# Altium PCB PDM-C_5vRelay_Board.PcbDoc
Units mil, origin at the board's own origin, x right, y up, seen from the top; angles counter-clockwise.
Board outline 5000 x 4200 mil, 2 copper layers (Top Layer, Bottom Layer); 110 components, 65 nets, 342 pads, 82 vias.
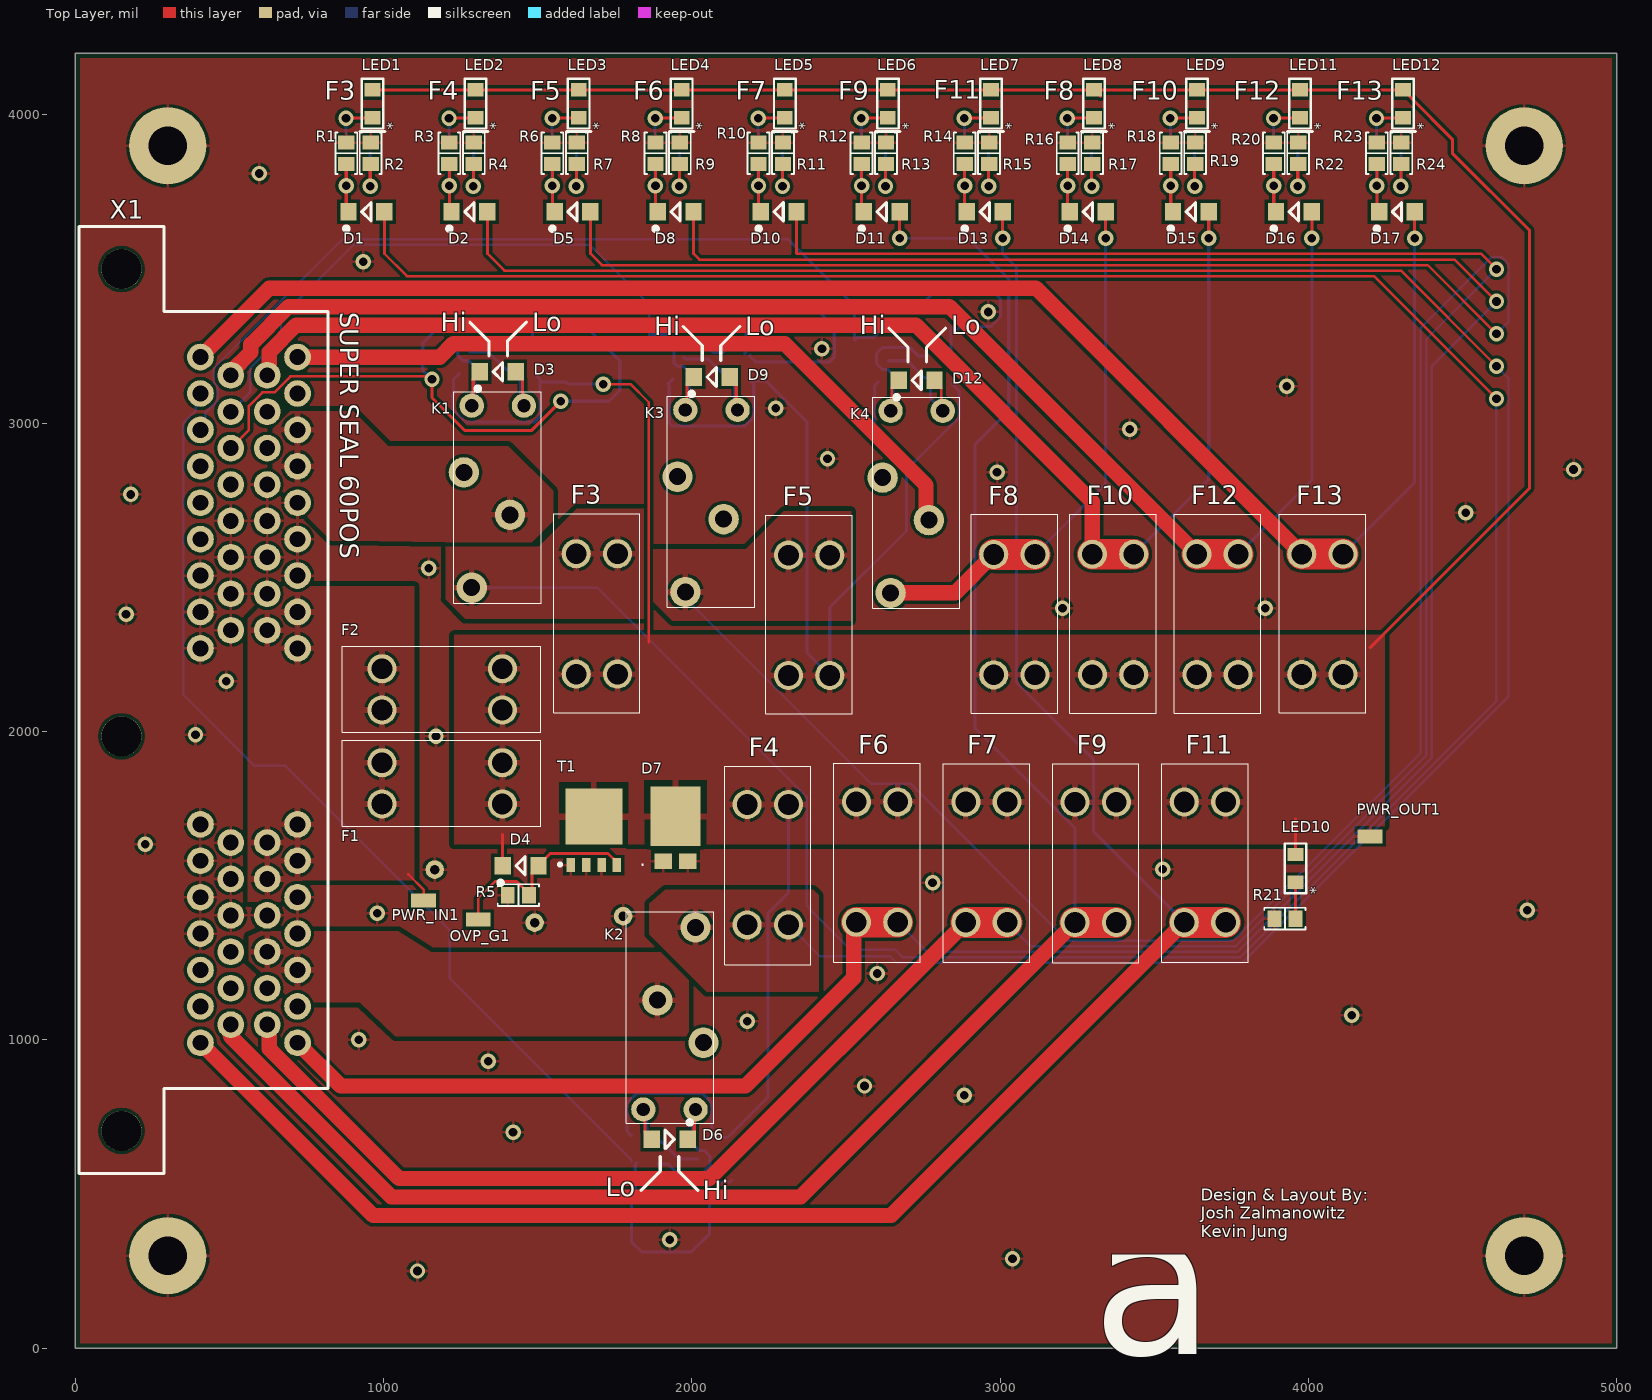
[diagram p0: Top Layer view]
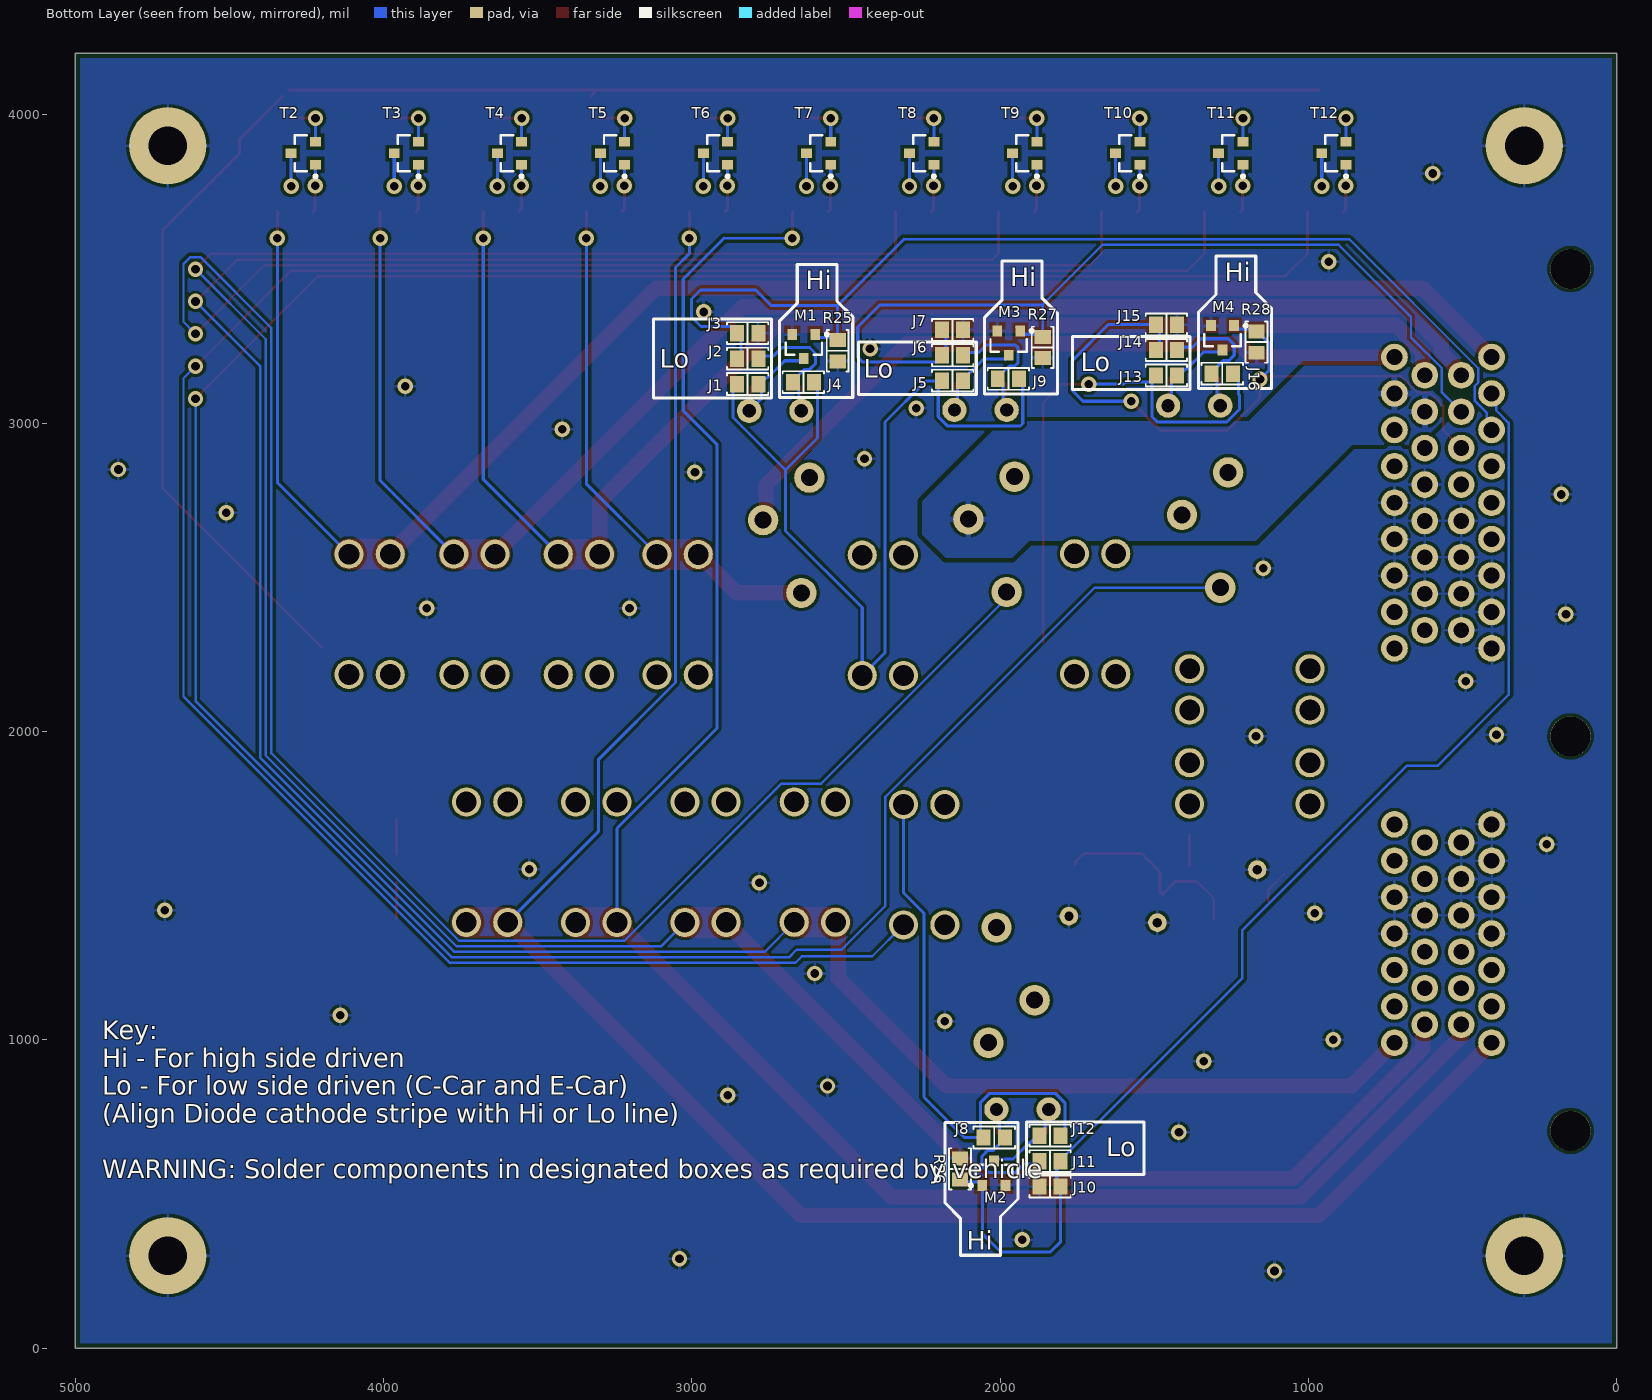
[diagram p1: Bottom Layer view, seen from below]
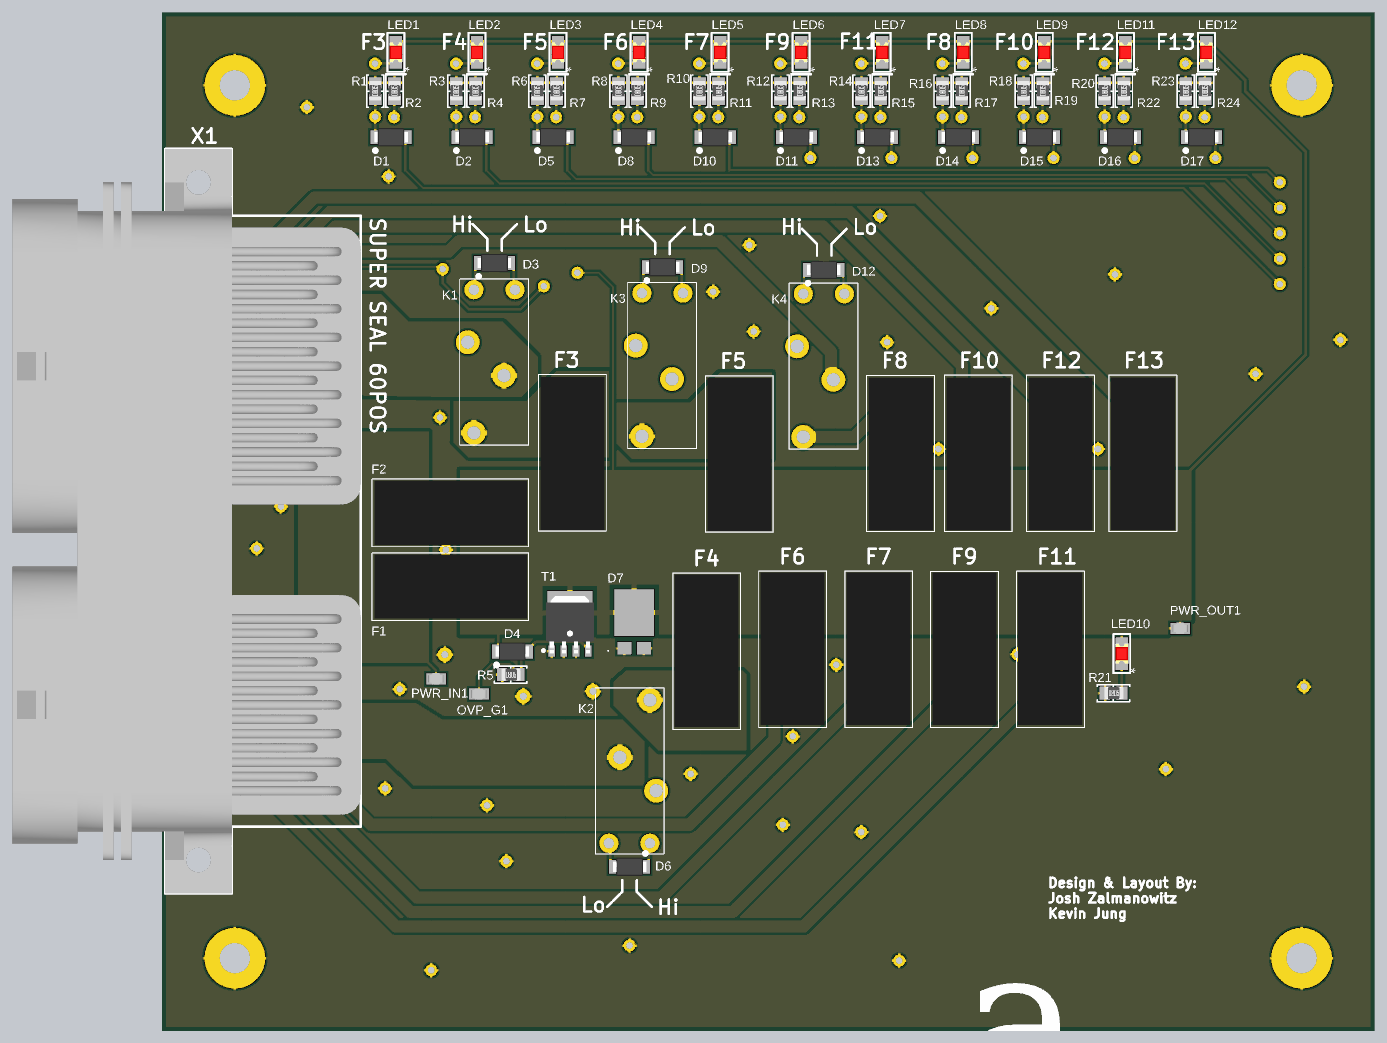
[diagram p2: 3D render of the assembled board from above, using the file's embedded part models]
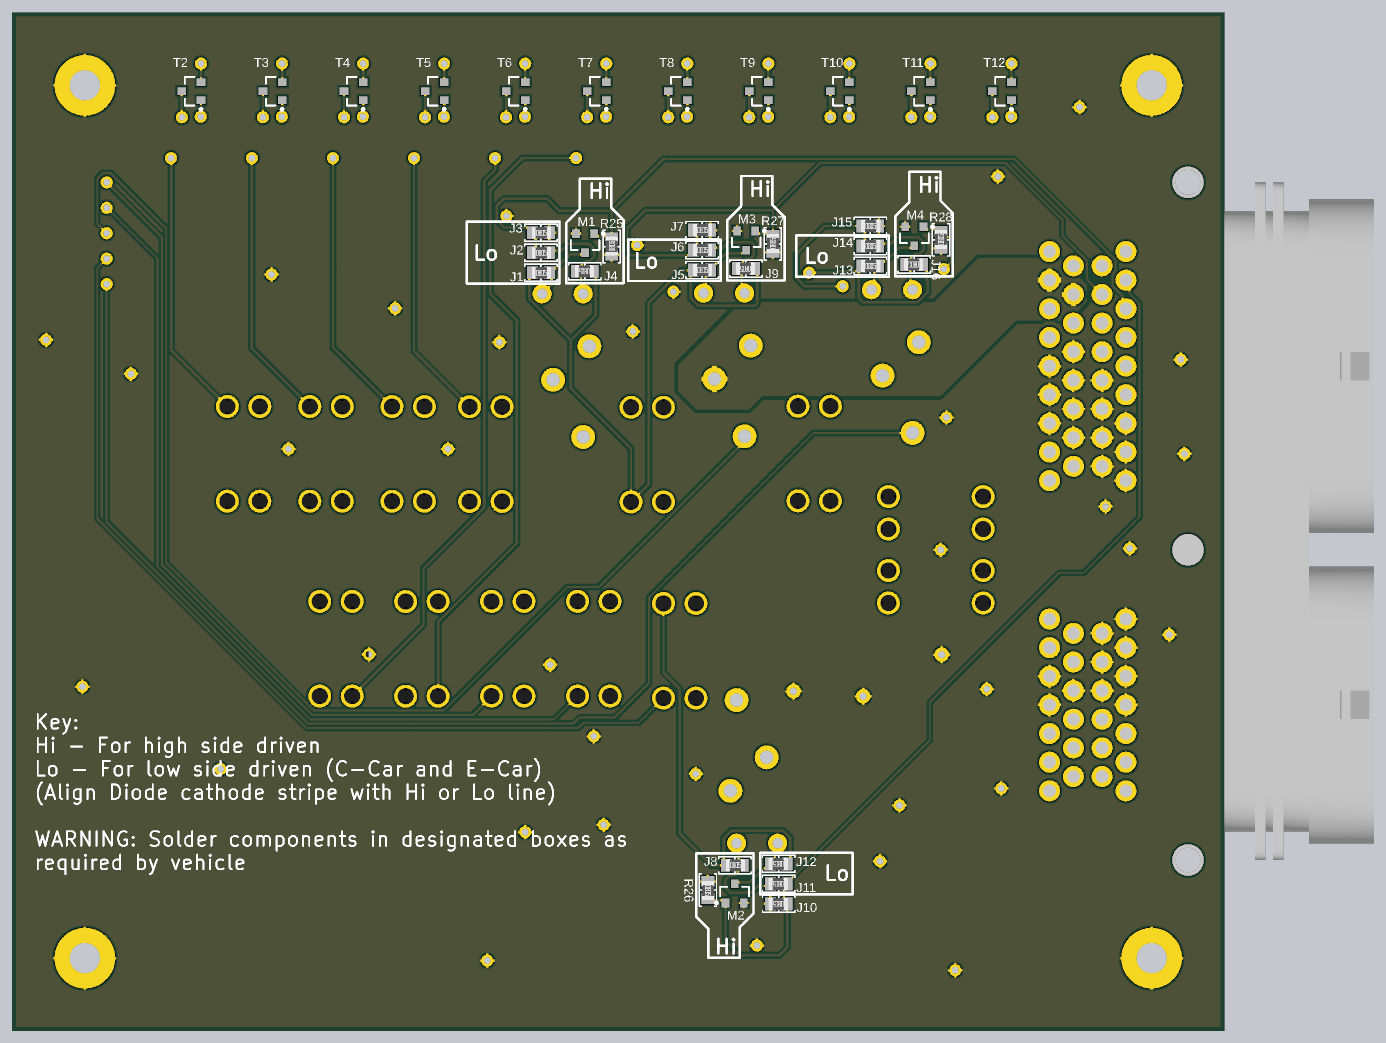
[diagram p3: 3D render of the assembled board from below, using the file's embedded part models]

## Layer stack, top to bottom
Top Solder: solder mask 0.4, Solder Resist, Dk 3.5
Top Layer: signal copper 1.4
Dielectric 1: dielectric 12.6, FR-4, Dk 4.8
Bottom Layer: signal copper 1.4
Bottom Solder: solder mask 0.4, Solder Resist, Dk 3.5

## Board outline
0,0 5000,0 5000,4200 0,4200

## Design rules (kind name [scope] priority, off if disabled: settings)
BoardOutlineClearance [All] p1: gap=15 ignorepadtopadclearanceinfootprint=FALSE
Clearance [All] p1: gap=10 ignorepadtopadclearanceinfootprint=FALSE except(0: Arc-Hole Track-Hole SMDPad-Hole THPad-Hole Via-Hole Fill-Hole Poly-Hole Region-Hole Text-Hole; 8: Track-THPad; 15: Poly-Poly)
Height [All] p1: minheight=0 maxheight=10000 prefheight=500
HoleSize [All] p1: absolutevalues=TRUE maxlimit=150 minlimit=10 maxpercent=80.000 minpercent=20.000
MinimumAnnularRing [All] p1: minimumring=10
PolygonConnect [All] p1: connectstyle=Relief reliefconductorwidth=10 reliefentries=4 polygonreliefangle="90 Angle" airgapwidth=10
RoutingVias [All] p1: holewidth=28 width=50 viastyle="Through Hole" minholewidth=28 minwidth=50 maxholewidth=28 maxwidth=50
SolderMaskExpansion [All] p1: expansion=4
Width [All] p1: maxlimit=100 minlimit=8 preferedwidth=10 minimp=50.000000 maximp=50.000000 favimp=50.000000
28 further rules are at their usual default settings.

## Classes and differential pairs
channel class Relay: U_Relay1 U_Relay2 U_Relay3 U_Relay4
channel class Blown_Fuse_LED: U_Blown_Fuse_LED1 U_Blown_Fuse_LED2 U_Blown_Fuse_LED3 U_Blown_Fuse_LED4 U_Blown_Fuse_LED5 U_Blown_Fuse_LED6 U_Blown_Fuse_LED7 U_Blown_Fuse_LED8 U_Blown_Fuse_LED9 U_Blown_Fuse_LED10 U_Blown_Fuse_LED11
component class U_Superseal: X1
component class U_RVP_OVP_HC: D4 D7 LED10 OVP_G1 PWR_IN1 PWR_OUT1 R5 R21 T1
component class U_Relay4: D12 J1 J2 J3 J4 K4 M1 R25
component class U_Relay3: D9 J5 J6 J7 J9 K3 M3 R27
component class U_Relay2: D3 J13 J14 J15 J16 K1 M4 R21
component class U_Relay1: D6 J8 J10 J11 J12 K2 M2 R26
component class U_Blown_Fuse_LED11: D14 F8 LED8 R16 R17 T5
component class U_Blown_Fuse_LED10: D15 F10 LED9 R18 R19 T4
component class U_Blown_Fuse_LED9: D16 F12 LED11 R20 R22 T3
component class U_Blown_Fuse_LED8: D17 F13 LED12 R23 R24 T2
component class U_Blown_Fuse_LED7: D7 F6 LED4 R8 R9 T9
component class U_Blown_Fuse_LED6: D10 F7 LED5 R10 R11 T8
component class U_Blown_Fuse_LED5: D11 F9 LED6 R12 R13 T7
component class U_Blown_Fuse_LED4: D13 F11 LED7 R14 R15 T6
component class U_Blown_Fuse_LED3: D5 F5 LED3 R6 R7 T10
component class U_Blown_Fuse_LED2: D1 F3 LED1 R1 R2 T12
component class U_Blown_Fuse_LED1: D2 F4 LED2 R3 R4 T11
component class PDM: F1 F2

## Components (designator, comment, footprint, x,y, rotation, side; value= is the part's Value field where it differs from the comment)
D1 "1N5819" SOD123F 944.29,3686 r180 top value=1A (schematic designator D3)
D2 "1N5819" SOD123F 1278.58,3686 r180 top value=1A (schematic designator D3)
D3 "DIODE" SOD123F 1370.55,3167 r180 top value=1A (schematic designator D1)
D4 "DDZ9701-7" SOD123F 1444.29,1564.36 r180 top value=14Vz (schematic designator D7)
D5 "1N5819" SOD123F 1612.87,3686 r180 top value=1A (schematic designator D3)
D6 "DIODE" SOD123F 1928.18,677 r0 top value=1A (schematic designator D1)
D7 "DIODE_2A1K" TO-277 1946.92,1689.06 r90 top value="20 A" (schematic designator D8)
D8 "1N5819" SOD123F 1947.16,3686 r180 top value=1A (schematic designator D3)
D9 "DIODE" SOD123F 2064.26,3150 r180 top value=1A (schematic designator D1)
D10 "1N5819" SOD123F 2281.45,3686 r180 top value=1A (schematic designator D3)
D11 "1N5819" SOD123F 2615.74,3686 r180 top value=1A (schematic designator D3)
D12 "DIODE" SOD123F 2729,3139 r180 top value=1A (schematic designator D1)
D13 "1N5819" SOD123F 2950.03,3686 r180 top value=1A (schematic designator D3)
D14 "1N5819" SOD123F 3284.32,3686 r180 top value=1A (schematic designator D3)
D15 "1N5819" SOD123F 3618.62,3686 r180 top value=1A (schematic designator D3)
D16 "1N5819" SOD123F 3952.91,3686 r180 top value=1A (schematic designator D3)
D17 "1N5819" SOD123F 4287.2,3686 r180 top value=1A (schematic designator D3)
F1 "Fuse" 3568-MiniFuseHolder 1190.28,1831.93 r0 top
F2 "Fuse" 3568-MiniFuseHolder 1190.28,2136.85 r0 top
F3 "" 3568-MiniFuseHolder 1691.77,2381.48 r270 top locked
F4 "" 3568-MiniFuseHolder 2246.39,1567.98 r90 top locked (schematic designator F3)
F5 "" 3568-MiniFuseHolder 2380.42,2377 r270 top locked (schematic designator F3)
F6 "" 3568-MiniFuseHolder 2600.77,1576.48 r90 top locked (schematic designator F3)
F7 "" 3568-MiniFuseHolder 2955.64,1576.17 r90 top locked (schematic designator F3)
F8 "" 3568-MiniFuseHolder 3046.09,2379 r270 top locked (schematic designator F3)
F9 "" 3568-MiniFuseHolder 3309.96,1575.72 r90 top locked (schematic designator F3)
F10 "" 3568-MiniFuseHolder 3366.29,2379.72 r270 top locked (schematic designator F3)
F11 "" 3568-MiniFuseHolder 3664.31,1576.17 r90 top locked (schematic designator F3)
F12 "" 3568-MiniFuseHolder 3705.18,2380 r270 top locked (schematic designator F3)
F13 "" 3568-MiniFuseHolder 4045.31,2380.17 r270 top locked (schematic designator F3)
J1 "Resistor 1.0 0805 1/10W 10%" "RES 0805/2012" 2819,3127 r180 bottom value=1.0
J2 "Resistor 1.0 0805 1/10W 10%" "RES 0805/2012" 2819,3209.5 r180 bottom value=1.0 (schematic designator J4)
J3 "Resistor 1.0 0805 1/10W 10%" "RES 0805/2012" 2819,3292 r180 bottom value=1.0 (schematic designator J2)
J4 "Resistor 1.0 0805 1/10W 10%" "RES 0805/2012" 2638,3133 r0 bottom value=1.0 (schematic designator J3)
J5 "Resistor 1.0 0805 1/10W 10%" "RES 0805/2012" 2154.26,3138 r180 bottom value=1.0 (schematic designator J1)
J6 "Resistor 1.0 0805 1/10W 10%" "RES 0805/2012" 2154.26,3220.5 r180 bottom value=1.0 (schematic designator J4)
J7 "Resistor 1.0 0805 1/10W 10%" "RES 0805/2012" 2154.26,3303 r180 bottom value=1.0 (schematic designator J2)
J8 "Resistor 1.0 0805 1/10W 10%" "RES 0805/2012" 2019.18,683 r180 bottom value=1.0 (schematic designator J3)
J9 "Resistor 1.0 0805 1/10W 10%" "RES 0805/2012" 1973.26,3144 r0 bottom value=1.0 (schematic designator J3)
J10 "Resistor 1.0 0805 1/10W 10%" "RES 0805/2012" 1838.18,524 r0 bottom value=1.0 (schematic designator J2)
J11 "Resistor 1.0 0805 1/10W 10%" "RES 0805/2012" 1838.18,606.5 r0 bottom value=1.0 (schematic designator J4)
J12 "Resistor 1.0 0805 1/10W 10%" "RES 0805/2012" 1838.18,689 r0 bottom value=1.0 (schematic designator J1)
J13 "Resistor 1.0 0805 1/10W 10%" "RES 0805/2012" 1460.55,3155 r180 bottom value=1.0 (schematic designator J1)
J14 "Resistor 1.0 0805 1/10W 10%" "RES 0805/2012" 1460.55,3237.5 r180 bottom value=1.0 (schematic designator J4)
J15 "Resistor 1.0 0805 1/10W 10%" "RES 0805/2012" 1460.55,3320 r180 bottom value=1.0 (schematic designator J2)
J16 "Resistor 1.0 0805 1/10W 10%" "RES 0805/2012" 1279.55,3161 r0 bottom value=1.0 (schematic designator J3)
K1 "ACTP112" ACTP112#1 1436,2466.45 r90 top locked
K2 "ACTP112" ACTP112#2 1861.93,1364.55 r270 top locked (schematic designator K1)
K3 "ACTP112" ACTP112#2 2129,2452.45 r90 top locked (schematic designator K1)
K4 "ACTP112" ACTP112#2 2794.66,2449.51 r90 top locked (schematic designator K1)
LED1 "Red LED 0805" 0805_LED 964.29,4036 r270 top value=Red
LED2 "Red LED 0805" 0805_LED 1298.58,4036 r270 top value=Red (schematic designator LED1)
LED3 "Red LED 0805" 0805_LED 1632.87,4036 r270 top value=Red (schematic designator LED1)
LED4 "Red LED 0805" 0805_LED 1967.16,4036 r270 top value=Red (schematic designator LED1)
LED5 "Red LED 0805" 0805_LED 2301.45,4036 r270 top value=Red (schematic designator LED1)
LED6 "Red LED 0805" 0805_LED 2635.74,4036 r270 top value=Red (schematic designator LED1)
LED7 "Red LED 0805" 0805_LED 2970.03,4036 r270 top value=Red (schematic designator LED1)
LED8 "Red LED 0805" 0805_LED 3304.32,4036 r270 top value=Red (schematic designator LED1)
LED9 "Red LED 0805" 0805_LED 3638.62,4036 r270 top value=Red (schematic designator LED1)
LED10 "LED" 0805_LED 3958.31,1555.8 r270 top value=Green (schematic designator LED2)
LED11 "Red LED 0805" 0805_LED 3972.91,4036 r270 top value=Red (schematic designator LED1)
LED12 "Red LED 0805" 0805_LED 4307.2,4036 r270 top value=Red (schematic designator LED1)
M1 "DMG2302UK-7" SOT23-3 2637,3249 r270 bottom value=N_Channel
M2 "DMG2302UK-7" SOT23-3 2020.18,567 r90 bottom value=N_Channel (schematic designator M1)
M3 "DMG2302UK-7" SOT23-3 1972.26,3260 r270 bottom value=N_Channel (schematic designator M1)
M4 "DMG2302UK-7" SOT23-3 1278.55,3277 r270 bottom value=N_Channel (schematic designator M1)
OVP_G1 "RCU-0C" RCU-0C 1307,1389.63 r90 top (schematic designator OVP_G)
PWR_IN1 "RCU-0C" RCU-0C 1130,1451.78 r90 top (schematic designator PWR_IN)
PWR_OUT1 "RCU-0C" RCU-0C 4200,1660 r90 top (schematic designator PWR_OUT)
R1 "Resistor 47k 0805 1/10W 1%" "RES 0805/2012" 879.02,3875.72 r90 top value=47k
R2 "Resistor 470 0805 1/10W 1%" "RES 0805/2012" 958.31,3875.73 r90 top value=470
R3 "Resistor 47k 0805 1/10W 1%" "RES 0805/2012" 1213.31,3875.72 r90 top value=47k (schematic designator R1)
R4 "Resistor 470 0805 1/10W 1%" "RES 0805/2012" 1292.6,3875.73 r90 top value=470 (schematic designator R2)
R5 "Resistor 47k 0805 1/10W 1%" "RES 0805/2012" 1437.29,1469.36 r0 top value=47k (schematic designator R27)
R6 "Resistor 47k 0805 1/10W 1%" "RES 0805/2012" 1547.6,3875.72 r90 top value=47k (schematic designator R1)
R7 "Resistor 470 0805 1/10W 1%" "RES 0805/2012" 1626.89,3875.73 r90 top value=470 (schematic designator R2)
R8 "Resistor 47k 0805 1/10W 1%" "RES 0805/2012" 1881.89,3875.72 r90 top value=47k (schematic designator R1)
R9 "Resistor 470 0805 1/10W 1%" "RES 0805/2012" 1961.18,3875.73 r90 top value=470 (schematic designator R2)
R10 "Resistor 47k 0805 1/10W 1%" "RES 0805/2012" 2216.18,3875.72 r90 top value=47k (schematic designator R1)
R11 "Resistor 470 0805 1/10W 1%" "RES 0805/2012" 2295.47,3875.73 r90 top value=470 (schematic designator R2)
R12 "Resistor 47k 0805 1/10W 1%" "RES 0805/2012" 2550.47,3875.72 r90 top value=47k (schematic designator R1)
R13 "Resistor 470 0805 1/10W 1%" "RES 0805/2012" 2629.76,3875.73 r90 top value=470 (schematic designator R2)
R14 "Resistor 47k 0805 1/10W 1%" "RES 0805/2012" 2884.76,3875.72 r90 top value=47k (schematic designator R1)
R15 "Resistor 470 0805 1/10W 1%" "RES 0805/2012" 2964.05,3875.73 r90 top value=470 (schematic designator R2)
R16 "Resistor 47k 0805 1/10W 1%" "RES 0805/2012" 3219.05,3875.72 r90 top value=47k (schematic designator R1)
R17 "Resistor 470 0805 1/10W 1%" "RES 0805/2012" 3298.34,3875.73 r90 top value=470 (schematic designator R2)
R18 "Resistor 47k 0805 1/10W 1%" "RES 0805/2012" 3553.34,3875.72 r90 top value=47k (schematic designator R1)
R19 "Resistor 470 0805 1/10W 1%" "RES 0805/2012" 3632.63,3875.73 r90 top value=470 (schematic designator R2)
R20 "Resistor 47k 0805 1/10W 1%" "RES 0805/2012" 3887.63,3875.72 r90 top value=47k (schematic designator R1)
R21 "Resistor 470 0805 1/10W 1%" "RES 0805/2012" 3923.86,1393 r0 top value=470 (schematic designator R28)
R22 "Resistor 470 0805 1/10W 1%" "RES 0805/2012" 3966.92,3875.73 r90 top value=470 (schematic designator R2)
R23 "Resistor 47k 0805 1/10W 1%" "RES 0805/2012" 4221.92,3875.72 r90 top value=47k (schematic designator R1)
R24 "Resistor 470 0805 1/10W 1%" "RES 0805/2012" 4301.21,3875.73 r90 top value=470 (schematic designator R2)
R25 "Resistor 47k 0805 1/10W 10%" "RES 0805/2012" 2527,3235 r90 bottom value=47k (schematic designator R1)
R26 "Resistor 47k 0805 1/10W 10%" "RES 0805/2012" 2130.18,581 r270 bottom value=47k (schematic designator R1)
R27 "Resistor 47k 0805 1/10W 10%" "RES 0805/2012" 1862.26,3246 r90 bottom value=47k (schematic designator R1)
R28 "Resistor 47k 0805 1/10W 10%" "RES 0805/2012" 1168.55,3263 r90 bottom value=47k (schematic designator R1)
T1 "PSMN2R2-25YLC 25V Logic Level MOSFET" LFPAK-SO8 1681.92,1672.99 r90 top value=N_Channel (schematic designator T4)
T2 "MMBT4403WT1G" SOT23-3 4260.31,3875.73 r0 bottom (schematic designator T1)
T3 "MMBT4403WT1G" SOT23-3 3926.02,3875.73 r0 bottom (schematic designator T1)
T4 "MMBT4403WT1G" SOT23-3 3591.73,3875.73 r0 bottom (schematic designator T1)
T5 "MMBT4403WT1G" SOT23-3 3257.44,3875.73 r0 bottom (schematic designator T1)
T6 "MMBT4403WT1G" SOT23-3 2923.15,3875.73 r0 bottom (schematic designator T1)
T7 "MMBT4403WT1G" SOT23-3 2588.86,3875.73 r0 bottom (schematic designator T1)
T8 "MMBT4403WT1G" SOT23-3 2254.56,3875.73 r0 bottom (schematic designator T1)
T9 "MMBT4403WT1G" SOT23-3 1920.27,3875.73 r0 bottom (schematic designator T1)
T10 "MMBT4403WT1G" SOT23-3 1585.98,3875.73 r0 bottom (schematic designator T1)
T11 "MMBT4403WT1G" SOT23-3 1251.69,3875.73 r0 bottom (schematic designator T1)
T12 "MMBT4403WT1G" SOT23-3 917.4,3875.73 r0 bottom (schematic designator T1)
X1 "3-6437285-2" "SUPERSEAL 60POS 90Deg" 150,3500 r270 top value=CONN

## Footprints (in the part's own frame and the unit in brackets; to place one, negate y for a bottom-side part, rotate by r counter-clockwise, add the part's x,y. Pads: shape width x height; smd on the part's side, far side on the other; paste and mask are expansions set on the pad)
0805_LED [mm]
  rect 1.1x1.3 smd: 1(-1.15,0) 2(1.15,0)
  silkscreen extent -2.06,-1.02 2.29,1.02, body extent -1.05,-0.67 1.05,0.68, height 0.9
3568-MiniFuseHolder [mm] "3568 Mini Fuse Holder"
  round 2.4 hole 1.7: 1(-4.96,-1.7) 1(-4.96,1.7) 2(4.96,-1.7) 2(4.96,1.7)
  silkscreen extent -8.25,-3.56 8.13,3.56, body extent -8,-4.19 8,3.38, height 16.17
ACTP112#1 [mm] "ACTP112, 12V Relay"
  round 2 hole 1.1: COIL1(15,3.81) COIL2(15,-0.49)
  round 2.5 hole 1.4: COM(0,3.81) NC(9.5,4.46) NO(6,0.66)
  silkscreen extent -1.27,-1.91 16.13,5.3, body extent -1.27,-1.91 16.13,5.33, height 13.5
ACTP112#2 [mm] "ACTP112, 12V Relay"
  round 2 hole 1.1: COIL1(15,3.81) COIL2(15,-0.49)
  round 2.5 hole 1.4: COM(0,3.81) NO(6,0.66)
  round 2.5 hole 1.4 unplated: NC(9.5,4.46)
  silkscreen extent -1.27,-1.91 16.13,5.3, body extent -1.27,-1.91 16.13,5.33, height 13.5
LFPAK-SO8 [mm] "TO, 5-Pads, Body 5.15x5.86mm (max), IPC Low Density"
  rect 1.15x0.7 smd: 1(-2.7,1.905) 2(-2.7,0.635) 3(-2.7,-0.635) 4(-2.7,-1.905)
  rect 4.6x4.7 smd: mb(1.3,0)
  silkscreen extent -2.77,2.65 -2.53,2.9, body extent -2.95,-2.5 3.05,2.5, height 1.25
RCU-0C [mm]
  rect 1.15x2.05 smd: 1(0,0)
  body extent -0.6,-0.77 0.6,0.82, height 1.16
"RES 0805/2012" [mm] "Chip Resistor, 2-Leads, Body 2.00x1.25mm, IPC Medium Density"
  rect 1.15x1.35 smd: 1(-0.875,0) 2(0.875,0)
  silkscreen extent -1.7,-0.9 1.7,0.9, body extent -0.95,-0.62 1.05,0.63, height 0.6
SOD123F [mm] "SODFL, 2-Leads, Body 1.80x3.50mm, IPC Low Density"
  rect 1.35x1.45 smd: 1(-1.475,0) 2(1.475,0)
  silkscreen extent -0.38,-0.76 1.75,1.5, body extent -1.75,-0.95 1.75,0.95, height 1.15
SOT23-3 [mm] "SOT23, 3-Leads, Body 2.92x2.37mm, Pitch 0.95mm, IPC Medium Density, NUP2105L"
  rect 0.9x0.8 smd: 1(-1,0.95) 2(-1,-0.95) 3(1,0)
  silkscreen extent -1.12,-1.5 0.7,2.02, body extent -0.7,-1.52 0.7,1.52, height 1.11
"SUPERSEAL 60POS 90Deg" [mm]
  round 2.2 hole 1.3: A1(7.25,14.5) A2(10.25,14.5) A3(13.25,14.5) A4(16.25,14.5) A5(19.25,14.5) A6(22.25,14.5) A7(25.25,14.5) A8(28.25,14.5) A9(31.25,14.5) A10(8.75,12) A11(11.75,12) A12(14.75,12) A13(17.75,12) A14(20.75,12) A15(23.75,12) A16(26.75,12) A17(29.75,12) A18(8.75,9) A19(11.75,9) A20(14.75,9) A21(17.75,9) A22(20.75,9) A23(23.75,9) A24(26.75,9) A25(29.75,9) A26(7.25,6.5) A27(10.25,6.5) A28(13.25,6.5) A29(16.25,6.5) A30(19.25,6.5) A31(22.25,6.5) A32(25.25,6.5) A33(28.25,6.5) A34(31.25,6.5) B1(45.75,14.5) B2(48.75,14.5) B3(51.75,14.5) B4(54.75,14.5) B5(57.75,14.5) B6(60.75,14.5) B7(63.75,14.5) B8(47.25,12) B9(50.25,12) B10(53.25,12) B11(56.25,12) B12(59.25,12) B13(62.25,12) B14(47.25,9) B15(50.25,9) B16(53.25,9) B17(56.25,9) B18(59.25,9) B19(62.25,9) B20(45.75,6.5) B21(48.75,6.5) B22(51.75,6.5) B23(54.75,6.5) B24(57.75,6.5) B25(60.75,6.5) B26(63.75,6.5)
  round 3.3 hole 3.3 unplated: CH(38.5,0) LH(0,0) RH(71,0)
  silkscreen extent -3.5,-3.5 74.5,17, body extent -3.5,-19.5 74.5,17, height 28.15
TO-277 [mm] "DFN, 3-Leads, Body 4.44x5.91mm, Pitch 3.68mm, IPC Medium Density, FSV20100V"
  rect 1.3x1.45 smd: 1(-2.794,1.016) 2(-2.794,-1.016)
  rect 4.9x4.15 smd: 3(0.913,0)
  silkscreen extent -3.12,2.67 -3.03,2.76, body extent -3.3,-2.31 3.56,2.32, height 1.2

## Part data
D1 D2 D3 D5 D6 D8 D9 D10 D11 D12 D13 D14 D15 D16 D17: library part 2, "Diode Super Barrier 40V 1A Surface Mount SOD-123F", Manufacturer_id=1, MfrPartNo=1N5819HW1-7-F, Package=SOD-123, Power=40V, Supplier1PartNo=1N5819HW1-7-FDITR-ND, ComponentLink1Description=Datasheet, ComponentLink1URL=https://www.diodes.com/assets/Datasheets/1N5819HW1.pdf, Drawer_id=1, Ic=1A, idDiode=2, Link=https://www.digikey.com/product-detail/en/diodes-incorporated/1N5819HW1-7-F/1N5819HW1-7-FDITR-ND/5768523, Name=1N5819, Num_Circuits=1, Supplier1=Digi-Key, Type="Super Barrier"
D4: library part 10, "Zener Diode 14V 500mW ±5% Surface Mount SOD-123", Manufacturer_id=8, Package=SOD-123, Power=500mW, Supplier1PartNo=DDZ9701-7DICT-ND, ComponentLink1Description=Datasheet, ComponentLink1URL=https://www.diodes.com/assets/Datasheets/ds30410.pdf, Drawer_id=1, idDiode=10, Link=https://www.digikey.com/product-detail/en/diodes-incorporated/DDZ9701-7/DDZ9701-7DICT-ND/3877402, MfrPartNo=DDZ9701-7, Name=DDZ9701, Num_Circuits=1, Supplier1=Digi-Key, Type=Zener
D7: library part 11, Manufacturer_id=1, MfrPartNo=FSV20100V, Package=TO-277, Supplier1PartNo=FSV20100VCT-ND, ComponentLink1Description=Datasheet, ComponentLink1URL=https://www.fairchildsemi.com/datasheets/FS/FSV20100V.pdf, Drawer_id=1, idDiode=11, Link=https://www.digikey.com/product-detail/en/on-semiconductor/FSV20100V/FSV20100VCT-ND/5306682, Name=FSV20100V, Type=Schottky
F1 F2 F3 F4 F5 F6 F7 F8 F9 F10 F11 F12 F13: library part 3, Manufacturer_id=1, Drawer_id=1, idFuse=3, Name="3568 Mini Fuse Holder"
  F2: Link=https://www.digikey.com/product-detail/en/keystone-electronics/3568/36-3568-ND/2137306
J1 J2 J3 J4 J5 J6 J7 J8 J9 J10 J11 J12 J13 J14 J15 J16: library part 2377, Manufacturer_id=1, Package=0805, Power=1/10W, Tolerance=10%, ComponentLink1Description=Datasheet, Created_By="Nick Mah", Created_Date=2018-10-20, Drawer_id=1, idResistor=2377, Name=Res_1.0_0805_1/10W_10%, Supplier 1=Digi-Key
K1 K2 K3 K4: library part 3, Coil_Voltage=12V, Manufacturer_id=1, Drawer_id=1, idRelay=3, LatestRevisionDate=17-Jul-2002, LatestRevisionNote="Re-released for DXP Platform.", Name=ACTP112, PackageReference=MODULE5B, Published=8-Jun-2000, Publisher="Altium Limited"
LED1 LED2 LED3 LED4 LED5 LED6 LED7 LED8 LED9 LED11 LED12: library part 1, Package=0805, Drawer_id=1, idLED=1, Manufacturer_id=1, Name=LED_0805_RED, Vf=0.7V
LED10: library part 2, Manufacturer_id=1, Package=0805, Brightness=7mcd, Drawer_id=1, Id=20mA, idLED=2, Link=https://www.digikey.com/product-detail/en/visual-communications-company-vcc/CMD17-21VGD-TR8/L62505CT-ND/254936, Name=CMD17_0805_GREEN, Vf=2.1V
M1 M2 M3 M4: library part 6, "MOSFET N-CHANNEL 30V 5A SOT23", Manufacturer_id=1, Package=SOT-23, Created_By=Angel, Drawer_id=1, Id=2.8A, idFETs=6, Link=https://www.digikey.com/product-detail/en/diodes-incorporated/DMG2302UK-7/DMG2302UK-7DICT-ND/6010163, MfrPartNo=DMG2302UK-7, Name=DMG2302UK-7, Num_Circuits=1, Rds_On=90mOhm, Supplier1=Digi-Key, Vdss=20V, Vgs(Max)=1V, Vgs(typ)=800mV
OVP_G1 PWR_IN1 PWR_OUT1: library part 5, Manufacturer_id=1, Package=0603, ComponentLink1Description=Datasheet, ComponentLink1URL=https://www.te.com/commerce/DocumentDelivery/DDEController?Action=srchrtrv&DocNm=1773266&DocType=DS&DocLang=English, Drawer_id=1, idTable=5, Link=https://www.digikey.com/product-detail/en/te-connectivity-amp-connectors/RCU-0C/A106145CT-ND/3477802, MfrPartNo=RCU-0C, Name=RCU-0C_Test_Point
R1 R3 R5 R6 R8 R10 R12 R14 R16 R18 R20 R23: library part 545, Manufacturer_id=1, Package=0805, Power=1/10W, Tolerance=1%, ComponentLink1Description=Datasheet, Created_By="Nick Mah", Created_Date=2018-10-20, Drawer_id=1, idResistor=545, Name=Res_47k_0805_1/10W_1%, Supplier 1=Digi-Key
R2 R4 R7 R9 R11 R13 R15 R17 R19 R21 R22 R24: library part 497, Manufacturer_id=1, Package=0805, Power=1/10W, Tolerance=1%, ComponentLink1Description=Datasheet, Created_By="Nick Mah", Created_Date=2018-10-20, Drawer_id=1, idResistor=497, Name=Res_470_0805_1/10W_1%, Supplier 1=Digi-Key
R25 R26 R27 R28: library part 2433, Manufacturer_id=1, Package=0805, Power=1/10W, Tolerance=10%, ComponentLink1Description=Datasheet, Created_By="Nick Mah", Created_Date=2018-10-20, Drawer_id=1, idResistor=2433, Name=Res_47k_0805_1/10W_10%, Supplier 1=Digi-Key
T1: library part 3, "N-Channel 25V 100A (Tc) 106W (Tc) Surface Mount LFPAK56, Power-SO8", Manufacturer_id=6, MfrPartNo=PSMN2R2-25YLC,115, Package=LFPAK-SO8, Supplier1PartNo=1727-5299-1-ND, ComponentLink1Description=Datasheet, ComponentLink1URL=https://assets.nexperia.com/documents/data-sheet/PSMN2R2-25YLC.pdf, Created_By=Nick, Drawer_id=1, Id=100A, idFETs=3, Link=https://www.digikey.com/product-detail/en/nexperia-usa-inc/PSMN2R2-25YLC115/1727-5299-1-ND/2674299, Name=PSMN2R2, Num_Circuits=1, Rds_On=2.5mOhm, Supplier1=Digi-Key, Vdss=25V, Vgs(Max)=20V, Vgs(typ)=10V
T2 T3 T4 T5 T6 T7 T8 T9 T10 T11 T12: library part 3, Manufacturer_id=1, Package=SOT23-3, Created_By=Angel, Drawer_id=1, Ic=600mA, idBJT=3, Link=https://www.digikey.com/product-detail/en/on-semiconductor/MMBT4403WT1G/MMBT4403WT1GOSCT-ND/3487572, MfrPartNo=MMBT4403WT1G, Name=MMBT4403WT1G, Num_Circuits=1, Type=PNP, Vce(Max)=-40V
X1: library part 3, "90 Degree", Manufacturer_id=1, ComponentLink1Description=Datasheet, Drawer_id=1, idConn=3, Link=https://www.te.com/usa-en/product-3-6437285-2.html, MfrPartNo=3-6437285-2, Name="AMP Superseal 60POS 90Deg", Num_Contacts=60, Num_Rows=4, Pitch="3 mm"

## Free pads (board coordinates)
  round 60 hole 30: 3(1490,1380) 4(1777,1401) 5(1166,1552)
  round 250 hole 125: MH(300,300) MH(300,3900) MH(4700,300) MH(4700,3900)

## Via types
v1: diameter 50, hole 28, Top Layer to Bottom Layer, 82 vias

## Nets (pads, with @x,y where several pads share a name; then routed paths per layer and width w, separated by ;. In a path a pad name is that pad's centre, name@x,y a point inside that pad or via, vN(x,y) a via of type N, cw(c..) or ccw(c..) an arc to the next point about the centre after c; other vN are vias at no path point)
"12 V_U_Blown_Fuse_LED1": D4.2 D7.3 F1.2 F2.2 F3.2 F4.2 F5.2 F6.2 F7.2 F8.2 F9.2 F10.2 F11.2 F12.2 F13.2 J1.1 J4.1 J5.1 J8.1 J9.1 J12.1 J13.1 J16.1 LED1.1 LED2.1 LED3.1 LED4.1 LED5.1 LED6.1 LED7.1 LED8.1 LED9.1 LED10.1 LED11.1 LED12.1 PWR_OUT1.1 T1.mb | length 12359.5
  Top Layer w8: v1(1713,3127) 1801,3127 1860,3068 1860,2290
  Top Layer w10: LED1.1 LED2.1 LED3.1 LED4.1 LED5.1 LED6.1 LED7.1 LED8.1 LED8.1@3308.26,4081.28 ; D4.2 1386.22,1665.98 ; LED8.1@3324.92,4060.68 3324.92,4064.62 LED8.1@3308.26,4081.28 ; LED10.1 3958.31,1715.98 ; 4200,2271.85 4717,2788.85 4717,3626 4467,3876 4467,3921.47 LED12.1@4327.79,4060.68 ; LED12.1 LED11.1 LED9.1 LED8.1@3308.26,4081.28
  Bottom Layer w10: J16.1 1227.46,3143.36 1227.46,3094.91 1223,3090.45 1223,3045.94 1264.31,3004.63 1490.77,3004.63 1507.66,3021.52 J13.1@1507.66,3138.4 ; J13.1 1507.66,3142.34 J13.1@1507.66,3138.4 ; v1(1713,3127) 1599.43,3127 1593.01,3133.43 1512.64,3133.43 J13.1@1507.66,3138.4 ; J12.1 1790.27,702.46 1790.27,795.69 1820.95,826.37 2033.62,826.37 2064.3,795.69 2064.3,693.67 J8.1 2116,683 2247,814 2247,1411 2313.31,1477.31 F4.2@2313.31,1763.25 ; J9.1@1938.81,3140.06 J9.1 1922,3127.19 1926.63,3122.56 1926.63,2999.37 1935.37,2990.63 2169.98,2990.63 2200.66,3021.31 2200.66,3126.05 J5.1 2188.71,3136.66 2241.28,3136.66 2373.73,3004.2 2373.73,2255.34 2447.35,2181.72 2447.35,2401.99 2696.03,2650.67 2696.03,2848.08 ; J4.1 2592.29,3121.73 2592.29,2951.82 2696.03,2848.08 ; J1.1@2844.74,3127 2866.32,3105.43 2866.32,3018.37 2696.03,2848.08
12V_IN: F1.1 F2.1 PWR_IN1.1 X1.A8 X1.A9 X1.A17 X1.B1 X1.B2 X1.B8 X1.B9 | length 105.9
  Top Layer w8: 1080,1537 1130,1487 PWR_IN1.1
Coil_In_U_Relay1: D6.2 J8.2 J11.2 K2.COIL1 | length 530.9
  Top Layer w10: D6.2 2007.82,698.57 2007.82,769.9 K2.COIL1
  Bottom Layer w10: J11.2@1890.63,597.5 1922.68,597.5 1950.18,570 2038.18,570 2041.83,573.65 2042.14,573.65 2058.18,589.69 2058.18,623.05 2039.8,641.43 2022.37,641.43 1984.73,679.06 2002.37,696.7 2002.37,764.44 K2.COIL1
Coil_In_U_Relay2: D3.2 J14.2 J16.2 K1.COIL1 | length 547.6
  Top Layer w10: K1.COIL1@1286,3067 1290.91,3071.91 1290.91,3145.43 D3.2
  Bottom Layer w10: K1.COIL1 1296.36,3067.36 1296.36,3143.36 J16.2 1314,3164.94 1276.36,3202.57 1258.93,3202.57 1240.55,3220.95 1240.55,3254.31 1256.59,3270.35 1256.9,3270.35 1260.55,3274 1348.55,3274 1376.05,3246.5 J14.2@1408.1,3246.5
Coil_In_U_Relay3: D9.2 J6.2 J9.2 K3.COIL1 | length 543.2
  Top Layer w10: K3.COIL1 1984.61,3048.61 1984.61,3128.42 D9.2
  Bottom Layer w10: K3.COIL1 1990.07,3054.07 1990.07,3126.36 J9.2 2007.71,3147.94 1970.07,3185.57 1952.64,3185.57 1950.3,3187.91 1941.51,3196.7 1941.51,3244.56 1950.3,3253.35 2045.91,3253.35 2069.76,3229.5 J6.2@2101.81,3229.5
Coil_In_U_Relay4: D12.2 J2.2 J4.2 K4.COIL1 | length 535.3
  Top Layer w8: K4.COIL1 2648.35,3043.76 2648.35,3116.43 D12.2
  Bottom Layer w8: K4.COIL1 2653.81,3049.22 2653.81,3114.36 J4.2
  Bottom Layer w10: J4.2 2672.45,3136.94 2634.81,3174.57 2617.38,3174.57 2599,3192.95 2599,3226.31 2615.04,3242.35 2615.35,3242.35 2619,3246 2707,3246 2734.5,3218.5 J2.2@2766.55,3218.5
Coil_Out_U_Relay1: D6.1 J12.2 K2.COIL2 M2.3 | length 376
  Top Layer w10: K2.COIL2 1848.53,768.1 1848.53,698.57 D6.1
  Bottom Layer w10: K2.COIL2 1854.99,761.65 1854.99,706.64 J12.2 ; J12.2@1882.63,689 1882.63,685.06 1900.27,667.43 1904.2,667.43 1958.26,613.37 M2.3@2019.18,613.37
Coil_Out_U_Relay2: D3.1 J13.2 K1.COIL2 M4.3 | length 391.3
  Top Layer w10: D3.1 1450.2,3145.43 1450.2,3072.09 K1.COIL2@1455.29,3067
  Bottom Layer w10: M4.3@1279.55,3230.63 1340.47,3230.63 1394.53,3176.57 1398.46,3176.57 1416.1,3158.94 J13.2@1416.1,3155 ; J13.2 1443.74,3137.36 1443.74,3068.55 K1.COIL2
Coil_Out_U_Relay3: D9.1 J5.2 K3.COIL2 M3.3 | length 400.6
  Top Layer w10: D9.1 2143.91,3128.42 2143.91,3047.39 K3.COIL2
  Bottom Layer w8: J5.2 J5.2@2138.45,3119.36 ; K3.COIL2@2138.45,3052.84 K3.COIL2
  Bottom Layer w10: M3.3@1973.26,3213.63 1978.98,3207.91 2053.83,3207.91 2109.81,3151.94 J5.2@2109.81,3138 ; K3.COIL2@2138.45,3052.84 J5.2@2138.45,3119.36
Coil_Out_U_Relay4: D12.1 J1.2 K4.COIL2 M1.3 | length 383.5
  Top Layer w8: D12.1 2809.65,3116.43 2809.65,3044.36 K4.COIL2
  Bottom Layer w10: M1.3@2638,3202.63 2698.92,3202.63 2752.98,3148.57 2756.91,3148.57 2774.55,3130.94 2774.55,3127 2774.55,3079.46 K4.COIL2
GND: D7.1 D7.2 J3.2 J7.2 J10.2 J15.2 M1.2 M2.2 M3.2 M4.2 pad.3 pad.4 pad.5 pad.MH R1.2 R2.2 R3.2 R4.2 R5.1 R6.2 R7.2 R8.2 R9.2 R10.2 R11.2 R12.2 R13.2 R14.2 R15.2 R16.2 R17.2 R18.2 R19.2 R20.2 R21.1 R22.2 R23.2 R24.2 R25.1 R26.1 R27.1 R28.1 T1.1 T1.2 T1.3 X1.A5 X1.A6 X1.A7 X1.A13 X1.A14 X1.A15 X1.A16 X1.A22 X1.A23 X1.A24 X1.A25 X1.A32 X1.A33 X1.A34 X1.B3 X1.B4 X1.B10 X1.B14 X1.B15 X1.B16 X1.B20 X1.B21 X1.B22 X1.B23
  other v1: 1110,250 3040,290 1928,352 1420,700 2883.78,820 2560,850 1340,930 920,1000 2180,1060 4140,1080 2601,1215 980,1410 4710,1420 2780.73,1510 3528,1553 227,1634.28 1170,1984.25 390,1990 490,2162.95 164.69,2380 3202.2,2400 3860,2400 1146,2530 4510,2710 180,2769.01 2990,2840.46 4860,2850 2440,2884.82 3420,2980 2272.37,3049 3930,3120 2422,3241 2961,3361 934,3524 597,3810
HC1_TO_RELAY: D5.1 F5.1 K3.COM | length 8311.4
  Top Layer w8: 1670.94,3550 1707.94,3513 4387,3513 v1(4610,3290)
  Top Layer w10: 1670.94,3550 D5.1
  Bottom Layer w8: K3.COM 1979,2432.43 2580.43,1831 2708.69,1831 3218.49,1321.2 3755.33,1321.2 4364.27,1930.15 4364.27,3309.42 4593.85,3539 4626.15,3539 4649,3516.15 4649,3329 v1(4610,3290)
HC2_TO_RELAY: D1.1 F3.1 K1.COM | length 9291.3
  Top Layer w8: 1002.36,3550 1075.36,3477 4213,3477 v1(4610,3080)
  Top Layer w10: 1002.36,3550 D1.1
  Bottom Layer w8: K1.COM 1693.9,2466.45 2372.56,1787.79 2372.56,1434.44 2515,1292 2660,1292 2684.8,1267.2 3777.69,1267.2 4610,2099.51 v1(4610,3080)
HC3_TO_RELAY: D2.1 F4.1 K2.COM | length 7393.3
  Top Layer w8: 1336.65,3550 1391.65,3495 4300,3495 v1(4610,3185)
  Top Layer w10: 1336.65,3550 D2.1
  Bottom Layer w8: F4.1@2313.31,1372.7 2415.02,1271 2643,1271 2664.8,1249.2 3785.15,1249.2 4649,2113.05 4649,3146 v1(4610,3185)
HC_1: K3.NO X1.A2 X1.A11
HC_2: K1.NO X1.A3 X1.A4
HC_3: K2.NO X1.B5 X1.B11
LC_1: D15.1 F10.1 X1.A10 | length 4537
  Top Layer w10: v1(3676.69,3600) D15.1
  Top Layer w50: X1.A10 629.45,3162.52 629.45,3231.06 716.38,3318 2726.4,3318 3299.36,2745.04 F10.1@3299.36,2575 ; F10.1@3432.2,2575 F10.1@3432.93,2574.28
  Top Layer w100: F10.1@3299.8,2575 F10.1@3432.2,2575
  Bottom Layer w10: F10.1@3433.22,2575 3676.69,2818.47 v1(3676.69,3600)
LC_2: D16.1 F12.1 X1.A18 | length 4922.8
  Top Layer w10: v1(4010.98,3600) D16.1
  Top Layer w50: X1.A18 504.33,3165.42 569.45,3230.54 569.45,3255.91 691.53,3378 2835.52,3378 F12.1@3638.25,2575.28
  Top Layer w100: F12.1@3638.25,2575.28 F12.1@3772.1,2575.28
  Bottom Layer w10: F12.1@3772.1,2575.28 4010.98,2814.15 v1(4010.98,3600)
LC_3: D17.1 F13.1 X1.A26 | length 5366.7
  Top Layer w10: v1(4344.46,3600) 4344.46,3676.28 4340,3680.73 D17.1
  Top Layer w50: X1.A26 629.34,3438 3115.83,3438 F13.1@3978.38,2575.45 ; F13.1@4111.76,2575.45 F13.1@4111.93,2575.28
  Top Layer w100: F13.1@3978.38,2575.45 F13.1@4111.76,2575.45
  Bottom Layer w10: F13.1@4112.24,2575.45 4344.46,2807.67 v1(4344.46,3600)
LC_4: D8.1 F6.1 X1.B7 | length 8730.2
  Top Layer w8: 2005.23,3550 2024.23,3531 4474,3531 v1(4610,3395)
  Top Layer w10: 2005.23,3550 D8.1
  Top Layer w50: X1.B7 861.02,850 2173.9,850 2525.33,1201.43 2525.33,1371.98 F6.1@2534.55,1381.21 ; F6.1@2667.45,1381.21 F6.1@2667.93,1380.72
  Top Layer w100: F6.1@2534.55,1381.21 F6.1@2667.45,1381.21
  Bottom Layer w8: F6.1@2667.7,1381.21 2763.7,1285.2 3770.24,1285.2 4400.27,1915.23 4400.27,3185.27 v1(4610,3395)
LC_5: D10.1 F7.1 X1.B13 | length 8740.1
  Top Layer w8: 2339.52,3550 3449.74,3550 4559.98,3550.02 v1(4610,3500)
  Top Layer w10: 2339.52,3550 D10.1
  Top Layer w50: X1.B13 629.45,1042.21 629.45,970.83 1050.28,550 2057.81,550 2888.4,1380.59 2888.4,1380.72 2888.58,1380.9 F7.1@2888.71,1380.9 ; F7.1@3022.09,1380.9 F7.1@3022.26,1380.72
  Top Layer w100: F7.1@2888.71,1380.9 F7.1@3022.09,1380.9
  Bottom Layer w8: F7.1@3022.57,1380.9 3100.26,1303.2 3762.78,1303.2 4382.27,1922.69 4382.27,3272.27 v1(4610,3500)
LC_6: D11.1 F9.1 X1.B19 | length 6257.6
  Top Layer w10: v1(2673.81,3600) D11.1
  Top Layer w50: X1.B19 504.33,1011.1 1025.43,490 2352.58,490 3242.74,1380.16 3242.74,1380.72 F9.1@3243.01,1380.45 ; F9.1@3376.32,1380.45 F9.1@3376.6,1380.72
  Top Layer w100: F9.1@3243.03,1380.45 F9.1@3376.32,1380.45
  Bottom Layer w8: v1(2673.81,3600) 2896,3600
  Bottom Layer w10: 2896,3600 3028,3468 3028,3041 2918.92,2931.92 2918.92,2009.91 3243.03,1685.8 F9.1@3243.03,1380.45
LC_7: D13.1 F11.1 X1.B26 | length 6500.3
  Top Layer w10: v1(3008.11,3600) D13.1
  Top Layer w50: X1.B26 966.06,430 2646.48,430 3597.07,1380.59 3597.07,1380.72 3597.24,1380.9 F11.1@3597.38,1380.9 ; F11.1@3730.76,1380.9 F11.1@3730.93,1380.72
  Top Layer w100: F11.1@3597.38,1380.9 F11.1@3730.76,1380.9
  Bottom Layer w10: v1(3008.11,3600) 3008.11,3550 3052.78,3505.33 3052.78,2158.77 3303.27,1908.28 3303.27,1675 F11.1@3597.38,1380.9
LC_8: K4.NO X1.A1 | length 2364
  Top Layer w8: K4.NO@2759.41,2695 K4.NO
  Top Layer w50: X1.A1 1182.57,3214.57 1226,3258 2300.86,3258 2759.41,2799.45 K4.NO@2759.41,2695
LC_TO_RELAY: D14.1 F8.1 K4.COM | length 1726.7
  Top Layer w10: v1(3342.4,3600) D14.1
  Top Layer w50: K4.COM 2854.31,2449.51 2979.07,2574.28 F8.1@2979.16,2574.28
  Top Layer w100: F8.1@2979.16,2574.28 F8.1@3112.93,2574.28
  Bottom Layer w10: F8.1@3113.02,2574.28 3342.4,2803.65 v1(3342.4,3600)
LED_IND_U_Blown_Fuse_LED1: LED2.2 T11.2 | length 163.3
  Top Layer w10: v1(1212.32,3989.74) 1213.31,3990.72 LED2.2
  Bottom Layer w10: T11.2 v1(1212.32,3989.74)
LED_IND_U_Blown_Fuse_LED2: LED1.2 T12.2 | length 163.3
  Top Layer w10: v1(878.03,3989.74) 879.02,3990.72 LED1.2
  Bottom Layer w10: T12.2 v1(878.03,3989.74)
LED_IND_U_Blown_Fuse_LED3: LED3.2 T10.2 | length 163.3
  Top Layer w10: v1(1546.61,3989.74) 1547.6,3990.72 LED3.2
  Bottom Layer w10: T10.2 v1(1546.61,3989.74)
LED_IND_U_Blown_Fuse_LED4: LED7.2 T6.2 | length 163.3
  Top Layer w10: v1(2883.78,3989.74) 2884.76,3990.72 LED7.2
  Bottom Layer w10: T6.2 v1(2883.78,3989.74)
LED_IND_U_Blown_Fuse_LED5: LED6.2 T7.2 | length 163.3
  Top Layer w10: v1(2549.49,3989.74) 2550.47,3990.72 LED6.2
  Bottom Layer w10: T7.2 v1(2549.49,3989.74)
LED_IND_U_Blown_Fuse_LED6: LED5.2 T8.2 | length 163.3
  Top Layer w10: v1(2215.19,3989.74) 2216.18,3990.72 LED5.2
  Bottom Layer w10: T8.2 v1(2215.19,3989.74)
LED_IND_U_Blown_Fuse_LED7: LED4.2 T9.2 | length 163.3
  Top Layer w10: v1(1880.9,3989.74) 1881.89,3990.72 LED4.2
  Bottom Layer w10: T9.2 v1(1880.9,3989.74)
LED_IND_U_Blown_Fuse_LED8: LED12.2 T2.2 | length 163.3
  Top Layer w10: v1(4220.94,3989.74) 4221.92,3990.72 LED12.2
  Bottom Layer w10: T2.2 v1(4220.94,3989.74)
LED_IND_U_Blown_Fuse_LED9: LED11.2 T3.2 | length 163.3
  Top Layer w10: v1(3886.65,3989.74) 3887.63,3990.72 LED11.2
  Bottom Layer w10: T3.2 v1(3886.65,3989.74)
LED_IND_U_Blown_Fuse_LED10: LED9.2 T4.2 | length 163.3
  Top Layer w10: v1(3552.36,3989.74) 3553.34,3990.72 LED9.2
  Bottom Layer w10: T4.2 v1(3552.36,3989.74)
LED_IND_U_Blown_Fuse_LED11: LED8.2 T5.2 | length 163.3
  Top Layer w10: v1(3218.07,3989.74) 3219.05,3990.72 LED8.2
  Bottom Layer w10: T5.2 v1(3218.07,3989.74)
NetD3_U_Blown_Fuse_LED1_2: D2.2 R3.1 T11.1 | length 226.3
  Top Layer w10: R3.1 v1(1213.31,3770.73) 1213.31,3693.2 D2.2
  Bottom Layer w10: T11.1 1212.32,3771.71 v1(1213.31,3770.73)
NetD3_U_Blown_Fuse_LED2_2: D1.2 R1.1 T12.1 | length 226.3
  Top Layer w10: R1.1 v1(879.02,3770.73) 879.02,3693.2 D1.2
  Bottom Layer w10: T12.1 878.03,3771.71 v1(879.02,3770.73)
NetD3_U_Blown_Fuse_LED3_2: D5.2 R6.1 T10.1 | length 226.3
  Top Layer w10: R6.1 v1(1547.6,3770.73) 1547.6,3693.2 D5.2
  Bottom Layer w10: T10.1 1546.61,3771.71 v1(1547.6,3770.73)
NetD3_U_Blown_Fuse_LED4_2: D13.2 R14.1 T6.1 | length 226.3
  Top Layer w10: R14.1 v1(2884.76,3770.73) 2884.76,3693.2 D13.2
  Bottom Layer w10: T6.1 2883.78,3771.71 v1(2884.76,3770.73)
NetD3_U_Blown_Fuse_LED5_2: D11.2 R12.1 T7.1 | length 226.3
  Top Layer w10: R12.1 v1(2550.47,3770.73) 2550.47,3693.2 D11.2
  Bottom Layer w10: T7.1 2549.49,3771.71 v1(2550.47,3770.73)
NetD3_U_Blown_Fuse_LED6_2: D10.2 R10.1 T8.1 | length 226.3
  Top Layer w10: R10.1 v1(2216.18,3770.73) 2216.18,3693.2 D10.2
  Bottom Layer w10: T8.1 2215.19,3771.71 v1(2216.18,3770.73)
NetD3_U_Blown_Fuse_LED7_2: D8.2 R8.1 T9.1 | length 226.3
  Top Layer w10: R8.1 v1(1881.89,3770.73) 1881.89,3693.2 D8.2
  Bottom Layer w10: T9.1 1880.9,3771.71 v1(1881.89,3770.73)
NetD3_U_Blown_Fuse_LED8_2: D17.2 R23.1 T2.1 | length 226.3
  Top Layer w10: R23.1 v1(4221.92,3770.73) 4221.92,3693.2 D17.2
  Bottom Layer w10: T2.1 4220.94,3771.71 v1(4221.92,3770.73)
NetD3_U_Blown_Fuse_LED9_2: D16.2 R20.1 T3.1 | length 226.3
  Top Layer w10: R20.1 v1(3887.63,3770.73) 3887.63,3693.2 D16.2
  Bottom Layer w10: T3.1 3886.65,3771.71 v1(3887.63,3770.73)
NetD3_U_Blown_Fuse_LED10_2: D15.2 R18.1 T4.1 | length 226.3
  Top Layer w10: R18.1 v1(3553.34,3770.73) 3553.34,3693.2 D15.2
  Bottom Layer w10: T4.1 3552.36,3771.71 v1(3553.34,3770.73)
NetD3_U_Blown_Fuse_LED11_2: D14.2 R16.1 T5.1 | length 226.3
  Top Layer w10: R16.1 v1(3219.05,3770.73) 3219.05,3693.2 D14.2
  Bottom Layer w10: T5.1 3218.07,3771.71 v1(3219.05,3770.73)
NetD7_1: D4.1 OVP_G1.1 R5.2 T1.4 | length 678
  Top Layer w8: OVP_G1.1 1307,1459.26 1361,1513.25
  Top Layer w10: 1361,1513.25 1431.78,1513.25 1471.74,1473.3 R5.2 1480.79,1478.41 1480.79,1542.79 D4.1 1502.36,1566.33 1540.36,1604.33 1728.14,1604.33 1756.92,1575.55 T1.4
NetLED2_2: LED10.2 R21.2 | length 117.5
  Top Layer w10: R21.2 LED10.2
NetR2_U_Blown_Fuse_LED1_1: R4.1 T11.3 | length 180.7
  Top Layer w10: v1(1291.06,3768.48) 1291.06,3839.74 R4.1
  Bottom Layer w10: v1(1291.06,3768.48) T11.3
NetR2_U_Blown_Fuse_LED2_1: R2.1 T12.3 | length 180.7
  Top Layer w10: v1(956.77,3768.48) 956.77,3839.74 R2.1
  Bottom Layer w10: v1(956.77,3768.48) T12.3
NetR2_U_Blown_Fuse_LED3_1: R7.1 T10.3 | length 180.7
  Top Layer w10: v1(1625.35,3768.48) 1625.35,3839.74 R7.1
  Bottom Layer w10: v1(1625.35,3768.48) T10.3
NetR2_U_Blown_Fuse_LED4_1: R15.1 T6.3 | length 180.7
  Top Layer w10: v1(2962.52,3768.48) 2962.52,3839.74 R15.1
  Bottom Layer w10: v1(2962.52,3768.48) T6.3
NetR2_U_Blown_Fuse_LED5_1: R13.1 T7.3 | length 180.7
  Top Layer w10: v1(2628.23,3768.48) 2628.23,3839.74 R13.1
  Bottom Layer w10: v1(2628.23,3768.48) T7.3
NetR2_U_Blown_Fuse_LED6_1: R11.1 T8.3 | length 180.7
  Top Layer w10: v1(2293.93,3768.48) 2293.93,3839.74 R11.1
  Bottom Layer w10: v1(2293.93,3768.48) T8.3
NetR2_U_Blown_Fuse_LED7_1: R9.1 T9.3 | length 180.7
  Top Layer w10: v1(1959.64,3768.48) 1959.64,3839.74 R9.1
  Bottom Layer w10: v1(1959.64,3768.48) T9.3
NetR2_U_Blown_Fuse_LED8_1: R24.1 T2.3 | length 180.7
  Top Layer w10: v1(4299.68,3768.48) 4299.68,3839.74 R24.1
  Bottom Layer w10: v1(4299.68,3768.48) T2.3
NetR2_U_Blown_Fuse_LED9_1: R22.1 T3.3 | length 180.7
  Top Layer w10: v1(3965.39,3768.48) 3965.39,3839.74 R22.1
  Bottom Layer w10: v1(3965.39,3768.48) T3.3
NetR2_U_Blown_Fuse_LED10_1: R19.1 T4.3 | length 180.7
  Top Layer w10: v1(3631.1,3768.48) 3631.1,3839.74 R19.1
  Bottom Layer w10: v1(3631.1,3768.48) T4.3
NetR2_U_Blown_Fuse_LED11_1: R17.1 T5.3 | length 180.7
  Top Layer w10: v1(3296.81,3768.48) 3296.81,3839.74 R17.1
  Bottom Layer w10: v1(3296.81,3768.48) T5.3
Relay_Sig_HC_1: J6.1 J7.1 M3.1 R27.2 X1.A19 | length 3069.8
  Bottom Layer w8: X1.A19 567.13,3100.2 567.13,3178.42 667.28,3278.57 667.28,3344.28 902,3579 1667.41,3579 1862.26,3384.15 R27.2
  Bottom Layer w10: R27.2 1870.43,3288.62 1924.11,3288.62 M3.1 ; 1862.26,3384.15 2389.71,3384.15 2462,3311.86 2462,3213.71 2447.22,3198.92 2206.35,3198.92 2188.71,3216.56 J6.1 ; M3.1@1946.42,3312.09 1945.61,3312.09 M3.1@1934.86,3301.34 ; J6.1@2170.71,3225.57 2176.16,3231.02 J7.1@2176.16,3306.94 ; J7.1 J7.1@2188.71,3319.29 ; M3.1 M3.1@1934.86,3301.34 ; M3.1 M3.1@1934.86,3301.34
Relay_Sig_HC_2: J14.1 J15.1 M4.1 R28.2 X1.A20 | length 2358
  Top Layer w8: X1.A20 563.1,2978.06 563.1,3056.27 607.03,3100.2 646.4,3100.2 697.96,3151.76 1138.24,3151.76 1147.71,3142.29 v1(1157,3142.29)
  Top Layer w10: v1(1157,3142.29) 1157,3083 1264,2976 1479,2976 v1(1574.33,3071.33)
  Bottom Layer w10: v1(1157,3142.29) 1126.98,3172.32 1126.98,3259.81 1164.61,3297.45 R28.2 1176.72,3305.62 1230.4,3305.62 M4.1 ; M4.1@1241.15,3318.34 M4.1@1251.9,3329.09 ; J14.1@1477,3242.57 1482.45,3248.02 J15.1@1482.45,3323.94 ; J15.1@1483.72,3325.21 J15.1@1483.72,3335.21 ; J15.1 1649,3320 1766,3203 1766,3106 1731.33,3071.33 v1(1574.33,3071.33)
Relay_Sig_HC_3: J10.1 J11.1 M2.1 R26.2 X1.A27 | length 3983.4
  Bottom Layer w8: X1.A27 390.86,3081.41 390.86,3041.52 350.6,3001.26 350.6,2119.4 580.3,1889.7 680.3,1889.7 1215.15,1354.85 1215.15,1199.02 1803.73,610.44 J11.1
  Bottom Layer w10: J10.1 1803.73,344.73 1836.46,312 1999,312 2057.58,370.58 M2.1 ; J10.1@1816.28,520.06 1816.28,595.98 J11.1@1821.73,601.43 ; M2.1@2046.01,514.91 2046.83,514.91 2057.58,525.66 M2.1 ; R26.2 2122.01,538.38 2068.33,538.38 M2.1
Relay_Sig_LC: J2.1 J3.1 M1.1 R25.2 X1.A28 | length 3618.1
  Bottom Layer w8: X1.A28 420.95,2993.39 420.95,3033.28 461.21,3073.55 461.21,3119.89 449.02,3132.08 449.02,3178.42 867.6,3597 2312.13,3597
  Bottom Layer w10: 2312.13,3597 2527,3382.13 ; M1.1@2611.17,3301.09 2610.35,3301.09 2599.6,3290.34 M1.1 2588.85,3277.62 2535.17,3277.62 R25.2 2527,3382.13 ; J2.1@2835.45,3214.57 2840.9,3220.02 J3.1@2840.9,3314.1 ; J3.1 2853.45,3295.94 2871.09,3313.57 2970.14,3313.57 3001,3344.43 3001,3403 2972,3432 2792.72,3432 2742.85,3382.13 2527,3382.13
pads on no net: K1.NC K2.NC K3.NC K4.NC X1.A12 X1.A21 X1.A29 X1.A30 X1.A31 X1.B6 X1.B12 X1.B17 X1.B18 X1.B24 X1.B25 X1.CH X1.LH X1.RH

## Polygon pours and split planes (outlines as drawn)
GND on Top Layer "GND_TOP" (solid, pour order 62): 0,0 5000,0 5000,4200 0,4200
12V_IN on Top Layer "Top Layer-12V_IN" (solid, pour order 57): 581,2387 666,2472 1100,2472 1100,1518 739,1518 668,1447 560,1447 560,2366
HC_3 on Top Layer "Top Layer-HC_3" (solid, pour order 56): 562,1336.1 562,1256.01 710.11,1121 923.04,1121 1038.6,1012 1990,1012 1990,1195 1901,1284 1156,1284 1047.2,1352 599.71,1352
HC_2 on Top Layer "Top Layer-HC_2" (solid, pour order 55): 1476,2610 1550,2684 1550,2781 1405,2926 1015,2926 902,3039 697,3039 640,2982 640,2810 831,2619 880,2619
HC2_TO_RELAY on Top Layer "Top Layer-NetD3_U_Blown_Fuse_LED2_1" (solid, pour order 54): 1264.5,2366 1201,2429.5 1202,2430.5 1202,2599 1503,2599 1626,2722 1844,2722 1844,2366
HC3_TO_RELAY on Top Layer "Top Layer-NetD3_U_Blown_Fuse_LED1_1" (solid, pour order 52): 1862,1441 1862,1343 2049,1156 2411,1156 2411,1469 2394,1486 1914,1486
"12 V_U_Blown_Fuse_LED1" on Top Layer "Top Layer-12 V_U_Blown_Fuse_LED1" (solid, pour order 58): 1228.78,2313.28 1228.78,1634.28 4246.78,1634.28 4246.78,2313.28
HC1_TO_RELAY on Top Layer "Top Layer-NetD3_U_Blown_Fuse_LED3_1" (solid, pour order 53): 1937,2359 1873.5,2422.5 1874.5,2423.5 1874.5,2592 2175.5,2592 2298.5,2715 2516.5,2715 2516.5,2359
no net on Top Layer "NONET_L01_P051" (solid, pour order 51): 88.86,451
no net on Top Layer "Top Layer-No Net" (solid, pour order 50): 1001.59,865
no net on Top Layer "Top Layer-No Net 1" (solid, pour order 49): 989.41,835
no net on Mechanical 1 (solid, pour order 60): 1134.86,1017
GND on Bottom Layer "GND_BOTTOM" (solid, pour order 63): 0,0 5000,0 5000,4200 0,4200
HC_1 on Bottom Layer "Bottom Layer-HC_1" (solid, pour order 61): 566.5,3075.5 678,3187 1013,3187 1193.5,3006.5 1993.5,3006.5 2253,2747 2253,2639 2177,2563 1961,2563 1906,2618 1171,2618 858,2931 642,2931 566.5,3006.5

## Silkscreen, mask and mechanical layers (free items; w line width, h text height)
Top Overlay:
  lines w10: 1279.77,3328 1341.54,3266.23 1341.54,3218 ; 1401.54,3218 1401.54,3266.23 1463.32,3328 ; 1835.61,512 1897.38,573.77 1897.38,622 ; 1957.38,622 1957.38,573.77 2019.16,512 ; 1971.93,3314 2033.71,3252.22 2033.71,3204 ; 2093.71,3204 2093.71,3252.22 2155.48,3314 ; 2639.23,3308 2701,3246.23 2701,3198 ; 2761,3198 2761,3246.23 2822.77,3308
  text "F11" at 2784,4053 h60
  text "F3" at 810,4050 h60
  text "F4" at 1143.09,4050 h60
  text "F5" at 1476.17,4050 h60
  text "F6" at 1809.26,4050 h60
  text "F7" at 2142.34,4050 h60
  text "F9" at 2475.43,4050 h60
  text "F8" at 3141.6,4050 h60
  text "F10" at 3424.69,4050 h60
  text "F12" at 3757.77,4050 h60
  text "F13" at 4090.86,4050 h60
  text "Hi" at 1185.04,3298 h60
  text "Lo" at 1481.54,3298 h60
  text "Hi" at 2544.5,3288 h60
  text "Lo" at 2841,3288 h60
  text "Hi" at 1877.5,3285 h60
  text "Lo" at 2174,3285 h60
  text "Lo" at 1720,492 h60
  text "Hi" at 2034.98,482 h60
  text "Design & Layout By: / Josh Zalmanowitz / Kevin Jung" at 3650,360 h39.37
  text "a" at 3299.15,-243.7 h1181.1
Bottom Overlay:
  lines w10: 1119.73,3112 1356.73,3112 1356.73,3360.42 1299.73,3417.42 1299.73,3431 1299.73,3543 1170.8,3543 1170.8,3424.07 1119.73,3373 1119.73,3112 ; 1383.73,3110 1765.73,3110 1765.73,3281 1383.73,3281 1383.73,3110 ; 1533,563 1533,734 1915,734 1915,563 1533,563 ; 1813.44,3095 2050.44,3095 2050.44,3343.42 1993.44,3400.42 1993.44,3414 1993.44,3526 1864.51,3526 1864.51,3407.07 1813.44,3356 1813.44,3095 ; 1942,483.58 1999,426.58 1999,413 1999,301 2127.93,301 2127.93,419.93 2179,471 2179,732 1942,732 1942,483.58 ; 2077.44,3093 2459.44,3093 2459.44,3264 2077.44,3264 2077.44,3093 ; 2478.18,3084 2715.18,3084 2715.18,3332.42 2658.18,3389.42 2658.18,3403 2658.18,3515 2529.25,3515 2529.25,3396.07 2478.18,3345 2478.18,3084 ; 2742.18,3082 3124.18,3082 3124.18,3338 2742.18,3338 2742.18,3082
  text "Hi" at 1271,3461 h60
  text "Hi" at 1967,3444 h60
  text "Hi" at 2630,3435 h60
  text "Lo" at 3104,3180 h60
  text "Lo" at 1739,3168 h60
  text "Lo" at 2443,3147.94 h60
  text "Lo" at 1656,622 h60
  text "Key: / Hi - For high side driven  / Lo - For low side driven (C-Car and E-Car) / (Align Diode cathode stripe with Hi or Lo line) /  / WARNING: Solder components in designated boxes as required by vehicle" at 4912,551 h60
  text "Hi" at 2108,319 h60

## Text inside footprints (layer, text, board x,y; h text height)
LED1: Top Overlay "*" at 984.29,3976 h60 r270
LED2: Top Overlay "*" at 1318.58,3976 h60 r270
LED3: Top Overlay "*" at 1652.87,3976 h60 r270
LED4: Top Overlay "*" at 1987.16,3976 h60 r270
LED5: Top Overlay "*" at 2321.45,3976 h60 r270
LED6: Top Overlay "*" at 2655.74,3976 h60 r270
LED7: Top Overlay "*" at 2990.03,3976 h60 r270
LED8: Top Overlay "*" at 3324.32,3976 h60 r270
LED9: Top Overlay "*" at 3658.62,3976 h60 r270
LED10: Top Overlay "*" at 3978.31,1495.8 h60 r270
LED11: Top Overlay "*" at 3992.91,3976 h60 r270
LED12: Top Overlay "*" at 4327.2,3976 h60 r270
X1: Top Overlay "SUPER SEAL 60POS" at 860,3360 h60 r270